# Altium PCB Alarm_Clock.PcbDoc
Units mm, origin at the board's own origin, x right, y up, seen from the top; angles counter-clockwise.
Board outline 104.39 x 59.56 mm, 2 copper layers (Top Layer, Bottom Layer); 25 components, 30 nets, 113 pads, 7 vias.
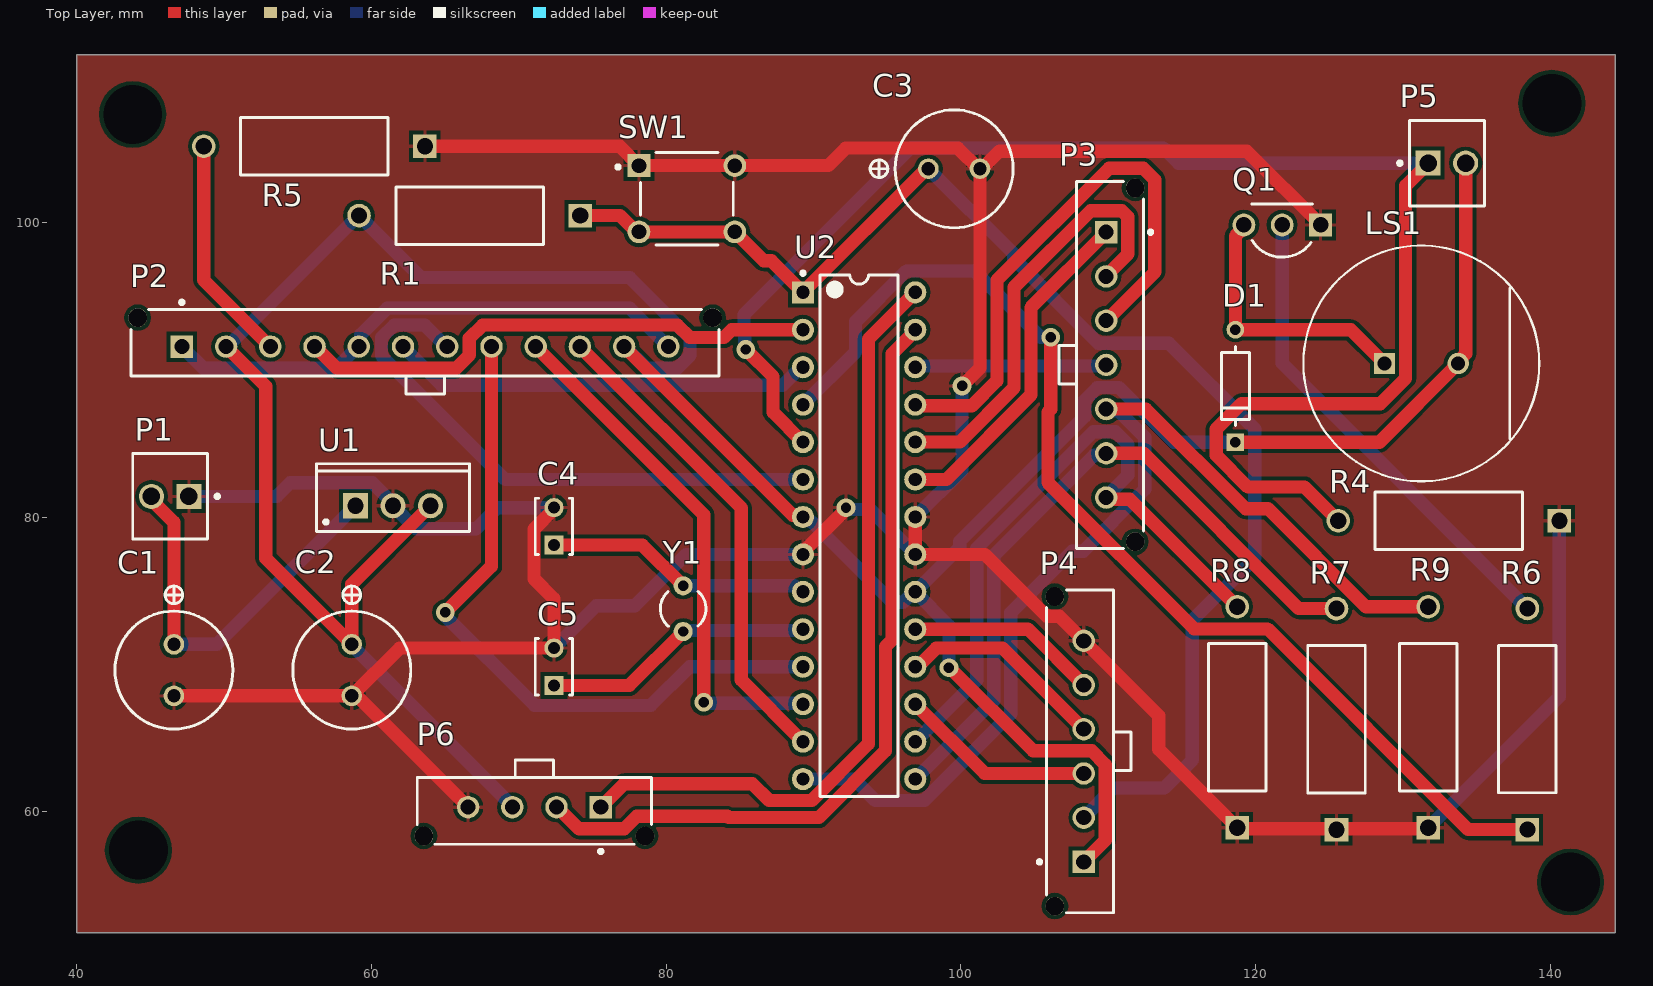
[diagram p0: Top Layer view]
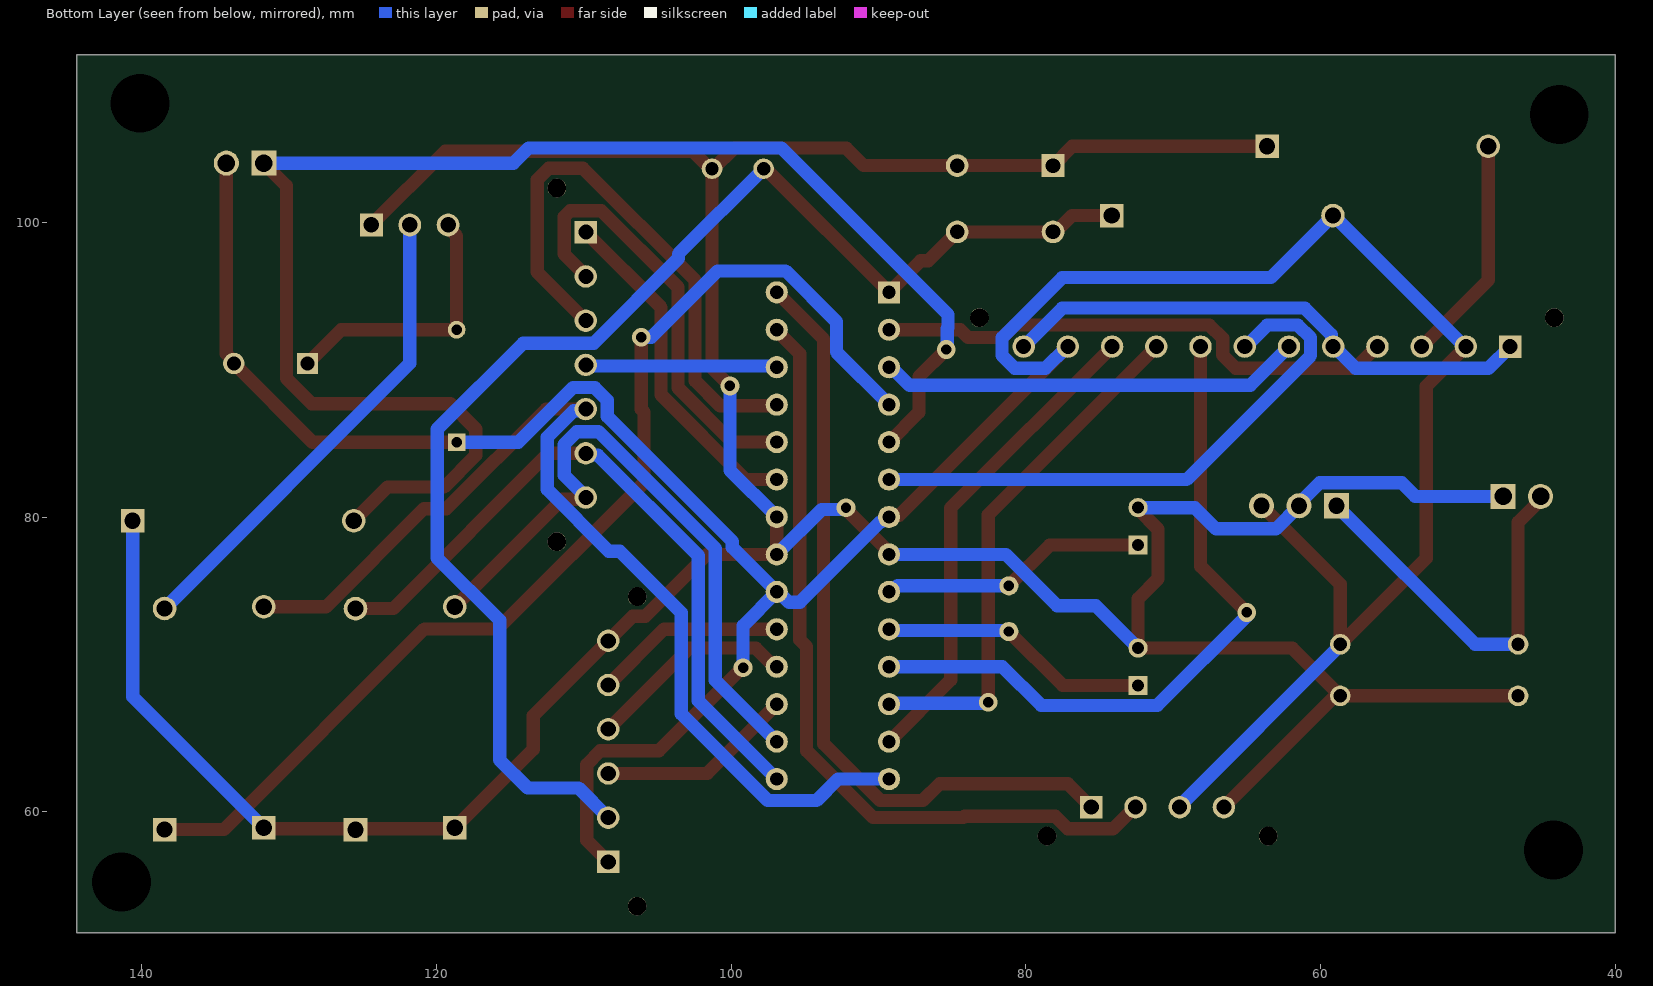
[diagram p1: Bottom Layer view, seen from below]

## Layer stack, top to bottom
Top Solder: solder mask 0.0102, Solder Resist, Dk 3.5
Top Layer: signal copper 0.0356
Dielectric 1: dielectric 0.32, FR-4, Dk 4.8
Bottom Layer: signal copper 0.0356
Bottom Solder: solder mask 0.0102, Solder Resist, Dk 3.5

## Board outline
40.005,111.379 40.005,51.816 144.399,51.816 144.399,111.379

## Design rules (kind name [scope] priority, off if disabled: settings)
AssemblyTestPointUsage [All] p1 off:
AssemblyTestpoint [All] p1 off: testpointundercomponent=TRUE minsize=1.016 maxsize=2.54 preferedsize=1.524 minholesize=0 maxholesize=1.016 preferedholesize=0.813 testpointgrid=0.025 usegrid=TRUE gridtolerance=0 allowsidetop=TRUE allowsidebottom=TRUE
Clearance [All] p1: gap=0.254 ignorepadtopadclearanceinfootprint=FALSE except(0: Arc-Hole Track-Hole SMDPad-Hole THPad-Hole Via-Hole Fill-Hole Poly-Hole Region-Hole Text-Hole)
FabricationTestPointUsage [All] p1 off: valid=0 allowmultiple=FALSE
FabricationTestpoint [All] p1 off: side=3 testpointundercomponent=TRUE minsize=1.016 maxsize=2.54 preferedsize=1.524 minholesize=0 maxholesize=1.016 preferedholesize=0.813 testpointgrid=0.025 allowsidetop=TRUE allowsidebottom=TRUE usegrid=TRUE gridtolerance=0
PolygonConnect [All] p1: connectstyle=Relief reliefconductorwidth=0.254 reliefentries=4 polygonreliefangle="90 Angle" airgapwidth=0.254
RoutingVias [All] p1: holewidth=0.711 width=1.27 viastyle="Through Hole" minholewidth=0.711 minwidth=1.27 maxholewidth=0.711 maxwidth=1.27
SilkToSilkClearance [All] p1: silktosilkclearance=0.02
SolderMaskExpansion [All] p1: expansion=0.102 istentingtop=FALSE
Width [All] p1: maxlimit=1.3 minlimit=0.3 preferedwidth=0.9
25 further rules are at their usual default settings.

## Components (designator, comment, footprint, x,y, rotation, side; value= is the part's Value field where it differs from the comment)
C1 "0.33uF" PNSC-FR-A-8X20-2_V 46.609,69.624 r270 top
C2 "0.1uF" PNSC-FR-A-8X20-2_V 58.674,69.624 r270 top
C3 "0.1uF" PNSC-FR-A-8X20-2_V 99.54,103.632 r0 top
C4 "22pF" KEMT-C315-THT-2 72.39,79.375 r90 top
C5 "22pF" KEMT-C315-THT-2 72.39,69.85 r90 top
D1 "DIODE" FP-017AG-MFG 118.618,88.9 r90 top value=2pF
LS1 "BUZZER" FP-SDC1610M5-01-MFG 131.231,90.424 r0 top
P1 "POWER" MOLX-22-27-2021_V 46.355,81.407 r180 top
P2 "LCD" 66201211122 63.651,91.822 r180 top
P3 "KEYPAD" 66200711122 110.11,90.328 r90 top
P4 "USBASP" 66200611122 108.076,64.111 r270 top
P5 "POWER" MOLX-22-27-2021_V 132.969,104.013 r0 top
P6 "66200411122" 66200411122 71.065,60.07 r0 top
Q1 "TRANSISTOR" FAIR-TO-92-3 121.793,99.822 r180 top
R1 "10k" VISH-A1-2_V2 66.668,100.457 r180 top
R4 "4.7k" VISH-A1-2_V2 133.096,79.756 r180 top
R5 "1k" VISH-A1-2_V2 56.134,105.156 r180 top
R6 "220" VISH-A1-2_V2 138.43,66.301 r90 top
R7 "4.7k" VISH-A1-2_V2 125.476,66.294 r90 top
R8 "4.7k" VISH-A1-2_V2 118.745,66.421 r90 top
R9 "4.7k" VISH-A1-2_V2 131.699,66.421 r90 top
SW1 "RESET BUTTON" FP-1825910-2-0 81.407,101.6 r0 top
U1 "L7812CV" TO220 61.468,80.772 r0 top
U2 "ATmega328P-PU" 28P3 93.091,78.74 r0 top
Y1 "16MHz" R38 81.153,73.787 r0 top

## Footprints (in the part's own frame and the unit in brackets; to place one, negate y for a bottom-side part, rotate by r counter-clockwise, add the part's x,y. Pads: shape width x height; smd on the part's side, far side on the other; paste and mask are expansions set on the pad)
28P3 [mm] "28-Pin Plastic Dual In-Line Package (PDIP)"
  rect 1.5x1.5 hole 0.9: 1(-3.81,16.51)
  round 1.5 hole 0.9: 2(-3.81,13.97) 3(-3.81,11.43) 4(-3.81,8.89) 5(-3.81,6.35) 6(-3.81,3.81) 7(-3.81,1.27) 8(-3.81,-1.27) 9(-3.81,-3.81) 10(-3.81,-6.35) 11(-3.81,-8.89) 12(-3.81,-11.43) 13(-3.81,-13.97) 14(-3.81,-16.51) 15(3.81,-16.51) 16(3.81,-13.97) 17(3.81,-11.43) 18(3.81,-8.89) 19(3.81,-6.35) 20(3.81,-3.81) 21(3.81,-1.27) 22(3.81,1.27) 23(3.81,3.81) 24(3.81,6.35) 25(3.81,8.89) 26(3.81,11.43) 27(3.81,13.97) 28(3.81,16.51)
  silkscreen extent -3.93,-17.7 2.65,17.93, body extent -3.6,-17.65 3.6,17.65, height 4.58
66200411122 [mm] "3.00mm Male Single Row Vertical Header, 4p"
  rect 1.52x1.52 hole 1.02: 1(4.5,0.255)
  round 1.52 hole 1.02: 2(1.5,0.255) 3(-1.5,0.255) 4(-4.5,0.255)
  round 1.27 hole 1.27 unplated: MH1(-7.5,-1.705) MH2(7.5,-1.705)
  silkscreen extent -7.95,-2.87 7.95,3.46, body extent -7.82,-2.19 7.83,3.38, height 9.93
66200611122 [mm] "3.00mm Male Single Row Vertical Header, 6p"
  rect 1.52x1.52 hole 1.02: 1(7.5,0.255)
  round 1.52 hole 1.02: 2(4.5,0.255) 3(1.5,0.255) 4(-1.5,0.255) 5(-4.5,0.255) 6(-7.5,0.255)
  round 1.27 hole 1.27 unplated: MH1(-10.5,-1.705) MH2(10.5,-1.705)
  silkscreen extent -10.95,-2.87 10.95,3.46, body extent -10.82,-2.19 10.83,3.38, height 9.93
66200711122 [mm] "3.00mm Male Single Row Vertical Header, 7p"
  rect 1.52x1.52 hole 1.02: 1(9,0.255)
  round 1.52 hole 1.02: 2(6,0.255) 3(3,0.255) 4(0,0.255) 5(-3,0.255) 6(-6,0.255) 7(-9,0.255)
  round 1.27 hole 1.27 unplated: MH1(-12,-1.705) MH2(12,-1.705)
  silkscreen extent -12.45,-2.88 12.45,3.46, body extent -12.32,-2.19 12.33,3.38, height 9.93
66201211122 [mm] "3.00mm Male Single Row Vertical Header, 12p"
  rect 1.52x1.52 hole 1.02: 1(16.5,0.255)
  round 1.52 hole 1.02: 2(13.5,0.255) 3(10.5,0.255) 4(7.5,0.255) 5(4.5,0.255) 6(1.5,0.255) 7(-1.5,0.255) 8(-4.5,0.255) 9(-7.5,0.255) 10(-10.5,0.255) 11(-13.5,0.255) 12(-16.5,0.255)
  round 1.27 hole 1.27 unplated: MH1(-19.5,-1.705) MH2(19.5,-1.705)
  silkscreen extent -19.95,-2.87 19.95,3.46, body extent -19.82,-2.19 19.83,3.38, height 9.93
FAIR-TO-92-3 [mm] "TO, 3-Leads, Body Dia 4.79mm, Pitch 2.6mm"
  rect 1.55x1.55 hole 1.05: 1(-2.6,0)
  round 1.55 hole 1.05: 2(0,0) 3(2.6,0)
  silkscreen extent -2.07,-1.43 2.07,2.19, body extent -2.4,-1.47 2.4,2.2, height 8.49
FP-017AG-MFG [mm]
  rect 1.2x1.2 hole 0.7 paste-1000 mask+0: 1(-3.813,0)
  round 1.2 hole 0.7 paste-1000 mask+0: 2(3.813,0)
  silkscreen extent -2.68,-0.95 2.68,0.95, body extent -4.51,-1.05 4.51,1.05, height 0.25
FP-1825910-2-0 [mm]
  rect 1.54x1.54 hole 0.99 paste-1000 mask+0: 1(-3.25,2.25)
  round 1.54 hole 0.99 paste-1000 mask+0: 2(3.25,2.25) 3(-3.25,-2.25) 4(3.25,-2.25)
  silkscreen extent -4.79,-3.15 3.15,3.15, body extent -4.12,-3.24 4.12,3.24, height 0.25
FP-SDC1610M5-01-MFG [mm]
  rect 1.45x1.45 hole 0.95 paste-1000 mask+0: 1(-2.5,0)
  round 1.45 hole 0.95 paste-1000 mask+0: 2(2.5,0)
  silkscreen extent -8,-8 8,8, body extent -8.1,-8.1 8.1,8.1, height 0.25
KEMT-C315-THT-2 [mm] "THD, 2-Leads, Body 3.81x2.54mm"
  rect 1.3x1.3 hole 0.8: 1(-1.27,0)
  round 1.3 hole 0.8: 2(1.27,0)
  silkscreen extent -1.91,-1.27 1.91,1.27, body extent -1.91,-1.27 1.91,1.27, height 4.66
MOLX-22-27-2021_V [mm] "Header, 2-Leads, Body 5.8x5.08mm"
  rect 1.7x1.7 hole 1.19: 1(-1.27,0)
  round 1.7 hole 1.19: 2(1.27,0)
  silkscreen extent -3.32,-2.9 2.54,2.9, body extent -2.54,-2.9 2.54,2.9, height 11.72
PNSC-FR-A-8X20-2_V [mm] "Radial Lead, 2-Leads, Dia 8mm, Body Length 22mm, Pin Spacing 3.5mm"
  round 1.4 hole 0.9: 1(-1.75,0) 2(1.75,0)
  silkscreen extent -5.7,-4 4,4, body extent -3.97,-3.99 4,3.99, height 22
R38 [mm] "Crystal, Thru-Hole; 2 Leads; Body 3.1 x 8.2 mm (Dia.xH)"
  round 1.3 hole 0.7: 1(0,1.55) 2(0,-1.55)
  silkscreen extent -1.55,-1.19 1.55,1.17
TO220 [mm] "TO, Thru-Hole, Vertical, Heatsink Mounted; 3 In-Line Leads; Pitch 2.54 mm"
  rect 1.7x1.7 hole 1.1: 1(-2.54,0)
  round 1.7 hole 1.1: 2(0,0) 3(2.54,0)
  silkscreen extent -5.2,-1.75 5.2,2.85, body extent -5.25,-1.8 5.25,2.9, height 19.7
VISH-A1-2_V2 [mm] "Through Hole, 2-Leads, Dia 3.9mm, Body Length 10mm, Pin Spacing 15mm"
  rect 1.6x1.6 hole 1.1: 1(-7.5,0)
  round 1.6 hole 1.1: 2(7.5,0)
  silkscreen extent -5,-1.95 5,1.95, body extent -7.91,-1.95 7.92,1.95, height 3.88

## Part data
C1 C2 C3: library part CMP-0744-00002-1, "Aluminum Electrolytic Capacitor, 1000 uF +/- 20%, 16 V, -40 to 105 degC, 2-Pin THD, Dia 8 mm, Body Length 22 mm, RoHS", Capacitance="1000 uF", Manufacturer=Panasonic, PartNumber=EEU-FR1C102L, Rated Ripple Current="1560 mA", Rated Voltage="16 V", Resistance="0.03 Ohm", Temperature Range="-40 to 105 degC", Tolerance="+/- 20%", ComponentLink1Description="Manufacturer URL", ComponentLink1URL=http://www.panasonic.com/industrial/electronic-components/, ComponentLink2Description=Datasheet, ComponentLink2URL=http://www.panasonic.com/industrial/includes/pdf/EEU-FR_DataSheet.pdf, DatasheetVersion=Apr-10, Mounting Technology="Through Hole", PackageDescription="2-Pin Radial Lead, Dia 8 mm, Body Length 22 mm, Pin Spacing 3.5 mm", PackageReference=FR-A-8X20-2, RoHS=TRUE
C4 C5: library part CMP-1664-00007-1, "Capacitor, Ceramic, 0.01 uF, +/- 10%, 100 V, X7R, -55 to 125 degC, 2-Pin THD, RoHS, Bulk", Case\Package=PDIP, Forward Current="60 mA", Forward Voltage="1.5 V", Max Operating Temperature="100 degC", Max Power Dissipation="400 mW", Min Operating Temperature="-55 degC", Output Voltage="70 V", Package Quantity=2000, Channels=2, ComponentLink1Description="Manufacturer URL", ComponentLink1URL=http://www.kemet.com/, ComponentLink2Description=Datasheet, ComponentLink2URL=http://capacitoredge.kemet.com/capedge2/DataSheet/Datasheet-C315C103K1R5TA.pdf?pn=C315C103K1R5TA{BULK}, DatasheetVersion=Aug-16, Mount="Through Hole", Nominal Vf="1.3 V", PackageDescription="2-Pin Through Hole Device, Body 3.81 x 2.54 mm", PackageReference=C315-THT-2, Packaging=Rail/Tube, Pins=16, Radiation Hardening=No, REACH SVHC=Unknown, RoHSCompliant=true, Vce Max="500 mV"
D1: library part CMP-07163-000006-1, "DIODE GEN PURP 15V 150MA DO35", Capacitance=2pF, Forward Current=150mA, Manufacturer="ON Semiconductor", Manufacturer Part Number=FJH1100, Max Junction Temp=+175°C, Package=017AG, Peak Reverse Current=0.00001uA, Reverse Voltage=30V, Temperature="to +175°C", Automotive=No, Category=Diode, ComponentLink2Description=Datasheet, ComponentLink2URL=https://www.onsemi.com/pub/Collateral/FJH1100-D.pdf, Device Class L1="Discrete Semiconductors", Device Class L2=Diodes, Device Class L3="Rectifier Diodes", Digikey Description="DIODE GEN PURP 15V 150MA DO35", Footprint Url=https://www.onsemi.com/pub/Collateral/017AG.PDF, Height=1.91mm, Lead Free=Yes, Mouser Description="Rectifiers Small Signal Diode", Octopart=https://octopart.com/fjh1100-on+semiconductor-84327057, RoHS=TRUE, Temperature Range High=+175°C
LS1: library part CMP-08413-000008-1, "AUDIO MAGNETIC INDICATOR 4-8V TH", Frequency=2.4kHz, Max Operating Temperature=70°C, Max Supply Current=30mA, Min Operating Temperature=-10°C, Nominal Supply Voltage (DC)=5V, Diameter=16mm, Height=10mm, Input Type=DC, Lead Free="Lead Free", Mount="Through Hole", Number of Pins=2, Number of Terminals/Pins=2, Operating Supply Current=30mA, Packaging=Tray, Sensing Method=Magnetic, Series=SDC, Termination="PC Pins", Voltage Rating=5V
P1 P5: library part CMP-2000-05537-1, "Male Header, Pitch 2.54 mm, 1 x 2 Position, Height 11.7 mm, Tail Length 3.56 mm, 0 to 75 degC, RoHS, Bulk", Current - Max=4A, Manufacturer=Molex, Operating temperature=0°Cto+75°C, Package Description="2-Leads Header, Body 5.08 x 5.8 mm, Pitch 2.54 mm", Package Reference=22-27-2021, Package Version="Rev. BC, 02/2012", PartNumber=0022272021, Voltage - Max=250V, Contact material=Tinplatedbrass, Current rating=4A, Datasheet URL=http://www.molex.com/pdm_docs/sd/022272021_sd.pdf, Datasheet Version="Rev. F, 06/2009", Housing material=Nylon(UL94V-0), Manufacturer URL=http://www.molex.com/, Mounting Technology=ThroughHole, No. of Positions=2, No. of Rows=1, Orientation=Vertical, Pitch=2.54mm, Voltage Rating=250V
P2: library part CMP-1502-00450-1, "THT Male Header WR-MPC3, Vertical, Single Row, pitch 3 mm, 12 pins", Contact Resistance=10mOhm, Manufacturer="Wurth Elektronik", Operating temperature=-40to105degC, Package Reference=66201211122, Working Voltage=250VAC, Datasheet URL=https://katalog.we-online.de/em/datasheet/6620xx11122.pdf, Gender=Male, Manufacturer URL=http://www.we-online.de, Mounting Technology=THT, Orientation=Vertical, Packaging=Tube, Part Number=66201211122, Pin Number=12, Pitch=3mm, Publisher=WurthElektronik
P3: library part CMP-1502-00445-1, "THT Male Header WR-MPC3, Vertical, Single Row, pitch 3 mm, 7 pins", Contact Resistance=10mOhm, Manufacturer="Wurth Elektronik", Operating temperature=-40to105degC, Package Reference=66200711122, Working Voltage=250VAC, Datasheet URL=https://katalog.we-online.de/em/datasheet/6620xx11122.pdf, Gender=Male, Manufacturer URL=http://www.we-online.de, Mounting Technology=THT, Orientation=Vertical, Packaging=Tube, Part Number=66200711122, Pin Number=7, Pitch=3mm, Publisher=WurthElektronik
P4: library part CMP-1502-00444-1, "THT Male Header WR-MPC3, Vertical, Single Row, pitch 3 mm, 6 pins", Contact Resistance=10mOhm, Manufacturer="Wurth Elektronik", Operating temperature=-40to105degC, Package Reference=66200611122, Working Voltage=250VAC, Datasheet URL=https://katalog.we-online.de/em/datasheet/6620xx11122.pdf, Gender=Male, Manufacturer URL=http://www.we-online.de, Mounting Technology=THT, Orientation=Vertical, Packaging=Tube, Part Number=66200611122, Pin Number=6, Pitch=3mm, Publisher=WurthElektronik
P6: library part CMP-1502-00442-1, "THT Male Header WR-MPC3, Vertical, Single Row, pitch 3 mm, 4 pins", Contact Resistance=10mOhm, Manufacturer="Wurth Elektronik", Operating temperature=-40to105degC, Working Voltage=250VAC, Datasheet URL=https://katalog.we-online.de/em/datasheet/6620xx11122.pdf, Gender=Male, Manufacturer URL=http://www.we-online.de, Mounting Technology=THT, Orientation=Vertical, Package Reference=66200411122, Packaging=Tube, Part Number=66200411122, Pin Number=4, Pitch=3mm, Publisher=WurthElektronik
Q1: library part CMP-2000-06911-1, "NPN General-Purpose Amplifier, 40 V, -55 to 150 degC, 3-Pin TO-92, RoHS, Tape and Reel", Collector- Base Voltage VCBO=75V, Collector- Emitter Voltage VCEO Max=40V, Collector-Emitter Saturation Voltage=1V, DC Current Gain hFE Max=300, Emitter- Base Voltage VEBO=6V, Manufacturer=FairchildSemiconductor, Maximum DC Collector Current=1A, Maximum Operating Temperature=+150C, Maximum Power Dissipation=625mW, Minimum Operating Temperature=-55C, Package / Case=TO-92-3KinkedLead, Package Description="3-Pin Transistor Outline Package, Body Dia 4.79 mm, Pitch 2.6 mm", Package Reference=TO-92, <PCN>=http://www.mouser.com/PCN/3.26.10LTBDFairchild.pdf, Brand=FairchildSemiconductor, Configuration=Single, Datasheet URL=https://www.fairchildsemi.com/datasheets/PN/PN2222A.pdf, Datasheet Version="Rev. 1.1.0, 07/2014", DC Collector/Base Gain hfe Min=100, Factory Pack Quantity=2000, Gain Bandwidth Product fT=300MHz, Manufacturer URL=https://www.fairchildsemi.com/, Mounting Style=ThroughHole, Mounting Technology=ThroughHole, Packaging=Reel, Product Category=BipolarTransistors-BJT, RoHS=Details, Series=PN2222, Transistor Polarity=NPN, Unit Weight=0.008466oz
R1 R4 R5 R6 R7 R8 R9: library part CMP-1240-00001-1, "Power Metal Film Leaded Resistor, 62 KOhm +/-5%, 2 W, 2-Pin THD, RoHS, Ammo Pack", Manufacturer="Vishay Semiconductor", PartNumber=PR02000206202JA100, Power="2 W", Resistance="62 KOhm", Temperature Coefficient="+/-250 ppm/degC", Tolerance=+/-5%, ComponentLink1Description="Manufacturer URL", ComponentLink1URL=http://www.vishay.com/, ComponentLink2Description=Datasheet, ComponentLink2URL=http://www.vishay.com/docs/28729/28729.pdf, ComponentLink3Description="Package Specification", ComponentLink3URL=http://www.vishay.com/docs/28729/28729.pdf, DatasheetVersion=Jun-13, Mounting Technology="Through Hole", PackageDescription="2-Pin Axial Lead, Body 10 x 3.9 mm", Packing="Ammo Pack", RoHS=TRUE
SW1: library part CMP-03407-000004-1, "SWITCH TACTILE SPST-NO 0.05A 24V", Contact Current Rating=50mA, Contact Resistance=100mΩ, Manufacturer=TE, Manufacturer Part Number=1825910-2, Operating Force=160gf, Package=0, Temperature="-35°C to +85°C", Temperature Range High=+85°C, Temperature Range Low=-35°C, Voltage Rating Dc=24V, Automotive=No, Category=Switch, ComponentLink2Description=Datasheet, ComponentLink2URL=https://www.te.com/commerce/DocumentDelivery/DDEController?Action=showdoc&DocId=Customer+Drawing%7F1825910%7FC10%7Fpdf%7FEnglish%7FENG_CD_1825910_C10.pdf%7F1825910-2, Device Class L1=Electromechanical, Device Class L2=Switches, Device Class L3="Tactile Switches", Digikey Description="SWITCH TACTILE SPST-NO 0.05A 24V", Electromechanical Life=100000Cycles, Height=4.6mm, Lead Free=Yes, Mount="Through Hole", Octopart=https://octopart.com/1825910-2-te+connectivity-42270502, RoHS=TRUE, Throw Configuration=SPST-NO
U1: library part CMP-0244-00450-1, "Positive Voltage Regulator, 12V, 3-Pin TO-220", ComponentLink1Description="Manufacturer URL", ComponentLink1URL=http://www.st.com, ComponentLink2Description=Datasheet, ComponentLink2URL=http://www.st.com/internet/com/TECHNICAL_RESOURCES/TECHNICAL_LITERATURE/DATASHEET/CD00000444.pdf, ComponentLink3Description="Package Specification", ComponentLink3URL=http://www.st.com/internet/com/TECHNICAL_RESOURCES/TECHNICAL_LITERATURE/PACKAGE_INFORMATION/CD00004649.pdf, DatasheetVersion=16/11/2011, PackageDescription="TO, Thru-Hole, Vertical, Heatsink Mounted; 3 In-Line Leads; Pitch 2.54 mm", PackageReference=TO220, PackageVersion=ver3.0
U2: library part CMP-0095-00013-2, "8-bit AVR Microcontroller, 32KB Flash, 1KB EEPROM, 2KB SRAM, 28-pin PDIP, Industrial Grade (-40°C to 85°C)", ComponentLink1Description="Manufacturer URL", ComponentLink1URL=http://www.atmel.com/, ComponentLink2Description="ATmega48A/48PA/88A/88PA/168A/168PA/328/328P Datasheet", ComponentLink2URL=http://www.atmel.com/dyn/resources/prod_documents/8271.pdf, ComponentLink3Description="ATmega48A/48PA/88A/88PA/168A/168PA/328/328P Summary", ComponentLink3URL=http://www.atmel.com/dyn/resources/prod_documents/8271S.pdf, DatasheetVersion="revD, May-2011", PackageDescription="28-lead (0.300\"/7.62mm Wide) Plastic Dual Inline Package (PDIP)", PackageReference=28P3, PackageVersion="revB, Sep-2001", RevisionNote="DatasheetVersion updated. URLs added."
Y1: library part XTAL, "Crystal Oscillator", LatestRevisionDate=17-Jul-2002, LatestRevisionNote="Re-released for DXP Platform.", PackageDescription="Crystal, Thru-Hole; 2 Leads; Body 3.1 x 8.2 mm (Dia.xH)", PackageReference=R38, Published=8-Jun-2000, Publisher="Altium Limited"

## Free pads (board coordinates)
  round 1.524 hole 4: 2(43.815,107.315) 2(44.196,57.404) 2(140.081,108.077) 2(141.351,55.245)

## Via types
v1: diameter 1.27, hole 0.711, Top Layer to Bottom Layer, 7 vias

## Nets (pads, with @x,y where several pads share a name; then routed paths per layer and width w, separated by ;. In a path a pad name is that pad's centre, name@x,y a point inside that pad or via, vN(x,y) a via of type N, cw(c..) or ccw(c..) an arc to the next point about the centre after c; other vN are vias at no path point)
GND: C1.2 C2.2 C3.2 C4.2 C5.2 P1.1 P4.6 P6.4 Q1.1 R4.1 R5.1 R7.1 R8.1 R9.1 SW1.1 SW1.2 U1.2 U2.8 U2.21 U2.22 | length 267.1
  Top Layer w0.9: C1.2@46.474,67.874 C1.2 C2.2 ; R5.1 76.851,105.156 SW1.1 SW1.2 91.008,103.85 92.194,105.036 99.795,105.036 101.199,103.632 C3.2 ; P6.4 59.112,67.778 58.77,67.778 C2.2 ; C4.2 72.39,80.537 71.036,79.183 71.036,75.814 72.39,74.46 C5.2 61.92,71.12 C2.2 ; U2.8@89.281,77.308 U2.8 89.281,77.624 92.202,80.545 v1(92.202,80.645) ; U2.22 U2.21 101.618,77.47 105.816,73.272 106.67,73.272 P4.6 113.422,66.52 113.422,64.244 R8.1 118.808,58.858 125.412,58.858 R7.1 125.539,58.858 131.636,58.858 R9.1 ; v1(100.076,88.9) 101.29,90.114 C3.2 ; Q1.1 119.394,104.821 102.614,104.821 101.425,103.632 C3.2
  Bottom Layer w0.9: P1.1 53.588,81.407 54.507,82.326 60.07,82.326 61.468,80.928 U1.2 61.471,80.772 63.025,79.218 67.11,79.218 68.537,80.645 C4.2 ; C5.2 75.253,73.983 77.884,73.983 81.371,77.47 U2.8 U2.8@89.316,77.47 ; v1@92.583,80.518 93.853,80.518 U2.21 ; U2.22 100.076,83.185 v1(100.076,88.9) ; R9.1 140.596,67.818 R4.1
NetC1_1: C1.1 P1.2 U1.1 | length 27
  Top Layer w0.9: P1.2 45.085,81.191 46.609,79.667 C1.1 C1.1@46.474,71.374
  Bottom Layer w0.9: C1.1 49.53,71.374 U1.1
NetC3_1: C3.1 P4.2 R1.1 SW1.3 SW1.4 U2.1 | length 92.1
  Top Layer w0.9: R1.1 76.877,100.457 77.984,99.35 SW1.3 SW1.4 86.618,97.389 87.142,97.389 U2.1 97.663,103.632 C3.1
  Bottom Layer w0.9: C3.1 103.567,97.855 103.567,97.545 109.321,91.792 114.109,91.792 119.922,85.979 119.922,77.225 115.697,73 115.697,63.519 113.802,61.624 110.344,61.624 P4.2
NetC4_1: C4.1 U2.9 Y1.1 | length 18.2
  Top Layer w0.9: C4.1 78.385,78.105 Y1.1
  Bottom Layer w0.9: Y1.1 88.712,75.337 89.119,74.93 U2.9
NetC5_1: C5.1 U2.10 Y1.2 | length 18.5
  Top Layer w0.9: C5.1 77.496,68.58 Y1.2
  Bottom Layer w0.9: Y1.2 81.229,72.314 89.205,72.314 U2.10
NetD1_2: D1.2 LS1.1 Q1.3 | length 18.4
  Top Layer w0.9: Q1.3 119.193,99.646 118.618,99.071 D1.2 126.442,92.713 LS1.1
NetP2_1: P2.1 P2.5 P2.12 | length 36.8
  Bottom Layer w0.9: P2.1 48.615,90.103 57.631,90.103 59.095,91.567 P2.5 59.27,91.686 59.27,92.388 61.067,94.185 77.533,94.185 P2.12
NetP2_3: P2.3 R5.2 | length 15.5
  Top Layer w0.9: R5.2 48.634,96.084 P2.3
NetP2_4: P2.4 U2.2 | length 36.2
  Top Layer w0.9: P2.4 56.207,91.567 57.671,90.103 65.757,90.103 66.651,90.997 66.651,92.137 67.545,93.031 80.757,93.031 81.6,92.188 83.933,92.188 84.455,92.71 U2.2
NetP2_6: P2.6 U2.3 | length 28.7
  Bottom Layer w0.9: P2.6 64.769,88.949 87.898,88.949 89.119,90.17 U2.3
NetP2_7: P2.7 U2.6 | length 38.7
  Bottom Layer w0.9: P2.7 65.095,91.567 63.631,93.031 61.545,93.031 60.687,92.173 60.687,90.961 69.098,82.55 U2.6
NetP2_8: P2.8 U2.11 | length 47.4
  Top Layer w0.9: v1(65.024,73.533) 68.151,76.66 P2.8
  Bottom Layer w0.9: v1@64.897,73.406 71.077,67.226 78.972,67.226 81.596,69.85 U2.11
NetP2_9: P2.9 U2.12 | length 35.6
  Top Layer w0.9: P2.9 82.55,80.168 v1(82.55,67.437)
  Bottom Layer w0.9: v1(82.55,67.437) 82.614,67.373 89.218,67.373 U2.12
NetP2_10: P2.10 U2.13 | length 33.1
  Top Layer w0.9: P2.10 85.096,80.622 85.096,68.955 U2.13
NetP3_1: P3.1 U2.23 | length 23.4
  Top Layer w0.9: U2.23 99.003,82.55 104.752,88.299 104.752,94.225 P3.1
NetP3_2: P3.2 U2.24 | length 29.7
  Top Layer w0.9: U2.24 99.911,85.09 103.598,88.777 103.598,95.587 108.803,100.792 110.907,100.792 111.319,100.38 111.319,97.848 109.855,96.384 P3.2
NetP3_3: P3.3 U2.25 | length 38.2
  Top Layer w0.9: U2.25 96.97,87.561 100.75,87.561 102.444,89.255 102.444,96.065 110.046,103.667 112.37,103.667 113.154,102.883 113.154,96.627 P3.3
NetP3_4: P3.4 U2.26 | length 13
  Bottom Layer w0.9: U2.26 96.98,90.249 109.776,90.249 P3.4
NetP3_5: P3.5 R9.2 U2.14 | length 70.9
  Top Layer w0.9: P3.5 112.549,87.328 119.312,80.565 120.832,80.565 127.476,73.921 R9.2
  Bottom Layer w0.9: U2.14 92.746,62.23 94.2,60.776 97.503,60.776 103.376,66.649 103.376,73.51 107.559,77.693 108.29,77.693 112.473,81.876 112.473,85.412 110.676,87.209 109.974,87.209 P3.5
NetP3_6: P3.6 R7.2 U2.15 | length 47.9
  Top Layer w0.9: P3.6 112.388,84.328 122.922,73.794 R7.2
  Bottom Layer w0.9: U2.15 102.222,67.551 102.222,77.397 109.034,84.209 109.736,84.209 P3.6
NetP3_7: P3.7 R8.2 U2.16 | length 44.9
  Top Layer w0.9: P3.7 109.974,81.209 111.457,81.209 R8.2
  Bottom Layer w0.9: U2.16 101.068,68.937 101.068,77.875 108.985,85.792 110.461,85.792 111.319,84.934 111.319,82.848 109.855,81.384 P3.7
NetP4_3: P4.3 U2.17 | length 13.4
  Top Layer w0.9: U2.17 101.6,62.611 P4.3
NetP4_4: P4.4 U2.18 | length 14.2
  Top Layer w0.9: U2.18 97.063,69.85 98.333,71.12 102.822,71.12 P4.4
NetP4_5: P4.5 U2.19 | length 13
  Top Layer w0.9: U2.19 104.552,72.39 P4.5
NetP5_1: P5.1 R4.2 U2.5 | length 103.3
  Top Layer w0.9: v1(85.407,91.371) 85.413,91.371 87.255,89.529 87.255,87.116 U2.5 ; R4.2 123.309,82.043 119.467,82.043 117.314,84.195 117.314,85.979 119.028,87.693 128.446,87.693 130.16,89.407 130.16,102.474 P5.1
  Bottom Layer w0.9: v1(85.407,91.371) 85.337,91.442 85.337,92.778 85.275,92.839 85.275,93.739 96.571,105.036 113.742,105.036 114.765,104.013 P5.1
NetP6_1: P6.1 U2.28 | length 52.8
  Top Layer w0.9: P6.1 77.148,61.908 85.851,61.908 86.982,60.776 89.883,60.776 93.726,64.619 93.726,92.075 U2.28
NetP6_2: P6.2 U2.27 | length 54.6
  Top Layer w0.9: P6.2 72.621,60.325 74.085,58.861 77.167,58.861 78.01,59.704 84.145,59.704 84.227,59.622 90.361,59.622 94.88,64.141 94.88,71.221 95.332,71.673 95.332,91.079 96.901,92.648 U2.27
NetQ1_2: Q1.2 R6.2 | length 33
  Top Layer w0.9: Q1.2 Q1.2@121.84,99.822
  Bottom Layer w0.9: Q1.2 121.793,90.438 R6.2
NetR6_1: R6.1 U2.4 | length 75.8
  Top Layer w0.9: v1(106.091,92.202) 106.091,87.315 105.906,87.13 105.906,82.343 115.832,72.417 120.799,72.417 134.415,58.801 R6.1
  Bottom Layer w0.9: U2.4 92.847,91.196 92.847,93.253 96.299,96.704 100.908,96.704 105.41,92.202 v1(106.091,92.202)
VCC: C2.1 D1.1 LS1.2 P2.2 P2.11 P4.1 P5.2 P6.3 R1.2 U1.3 U2.7 U2.20 | length 211
  Top Layer w0.9: P2.2 52.832,88.886 52.832,77.216 C2.1 58.674,75.438 U1.3 ; P2.11 88.593,80.125 89.166,80.125 U2.7 ; v1(99.187,69.781) 99.256,69.781 104.89,64.147 108.865,64.147 109.795,63.217 109.795,58.075 P4.1 ; D1.1 128.394,85.087 LS1.2 133.731,90.573 134.239,91.081 P5.2
  Bottom Layer w0.9: P2.2 50.215,91.567 59.105,100.457 R1.2 63.377,96.248 77.54,96.248 81.615,92.173 81.615,90.961 80.757,90.103 78.671,90.103 77.207,91.567 P2.11 ; C2.1 58.674,71.295 69.565,60.404 P6.3 ; U2.7 89.443,80.01 89.743,79.71 89.835,79.71 95.328,74.217 96.074,74.217 96.787,74.93 U2.20 ; v1(99.187,69.781) 99.187,72.644 U2.20 ; D1.1 114.43,85.087 110.725,88.792 109.249,88.792 108.391,87.934 108.391,86.83 99.914,78.353 99.914,77.943 U2.20
pads on no net: P2.MH1 P2.MH2 P3.MH1 P3.MH2 P4.MH1 P4.MH2 P6.MH1 P6.MH2

## Polygon pours and split planes (outlines as drawn)
GND on Top Layer "GND_L01_P000" (solid, pour order 0): 40.005,111.379 144.399,111.379 144.399,51.816 40.005,51.816

## Silkscreen, mask and mechanical layers (free items; w line width, h text height)
Mechanical 1:
  the board outline again, w0.001